# Altium PCB PCB1.PcbDoc
Units mm, origin at the board's own origin, x right, y up, seen from the top; angles counter-clockwise.
Board outline 100 x 80 mm, 2 copper layers (Top Layer, Bottom Layer), stack 1.535 mm thick; 21 components, 19 nets, 131 pads, 2 vias.
Unrouted connection lines stored in the file: 2.
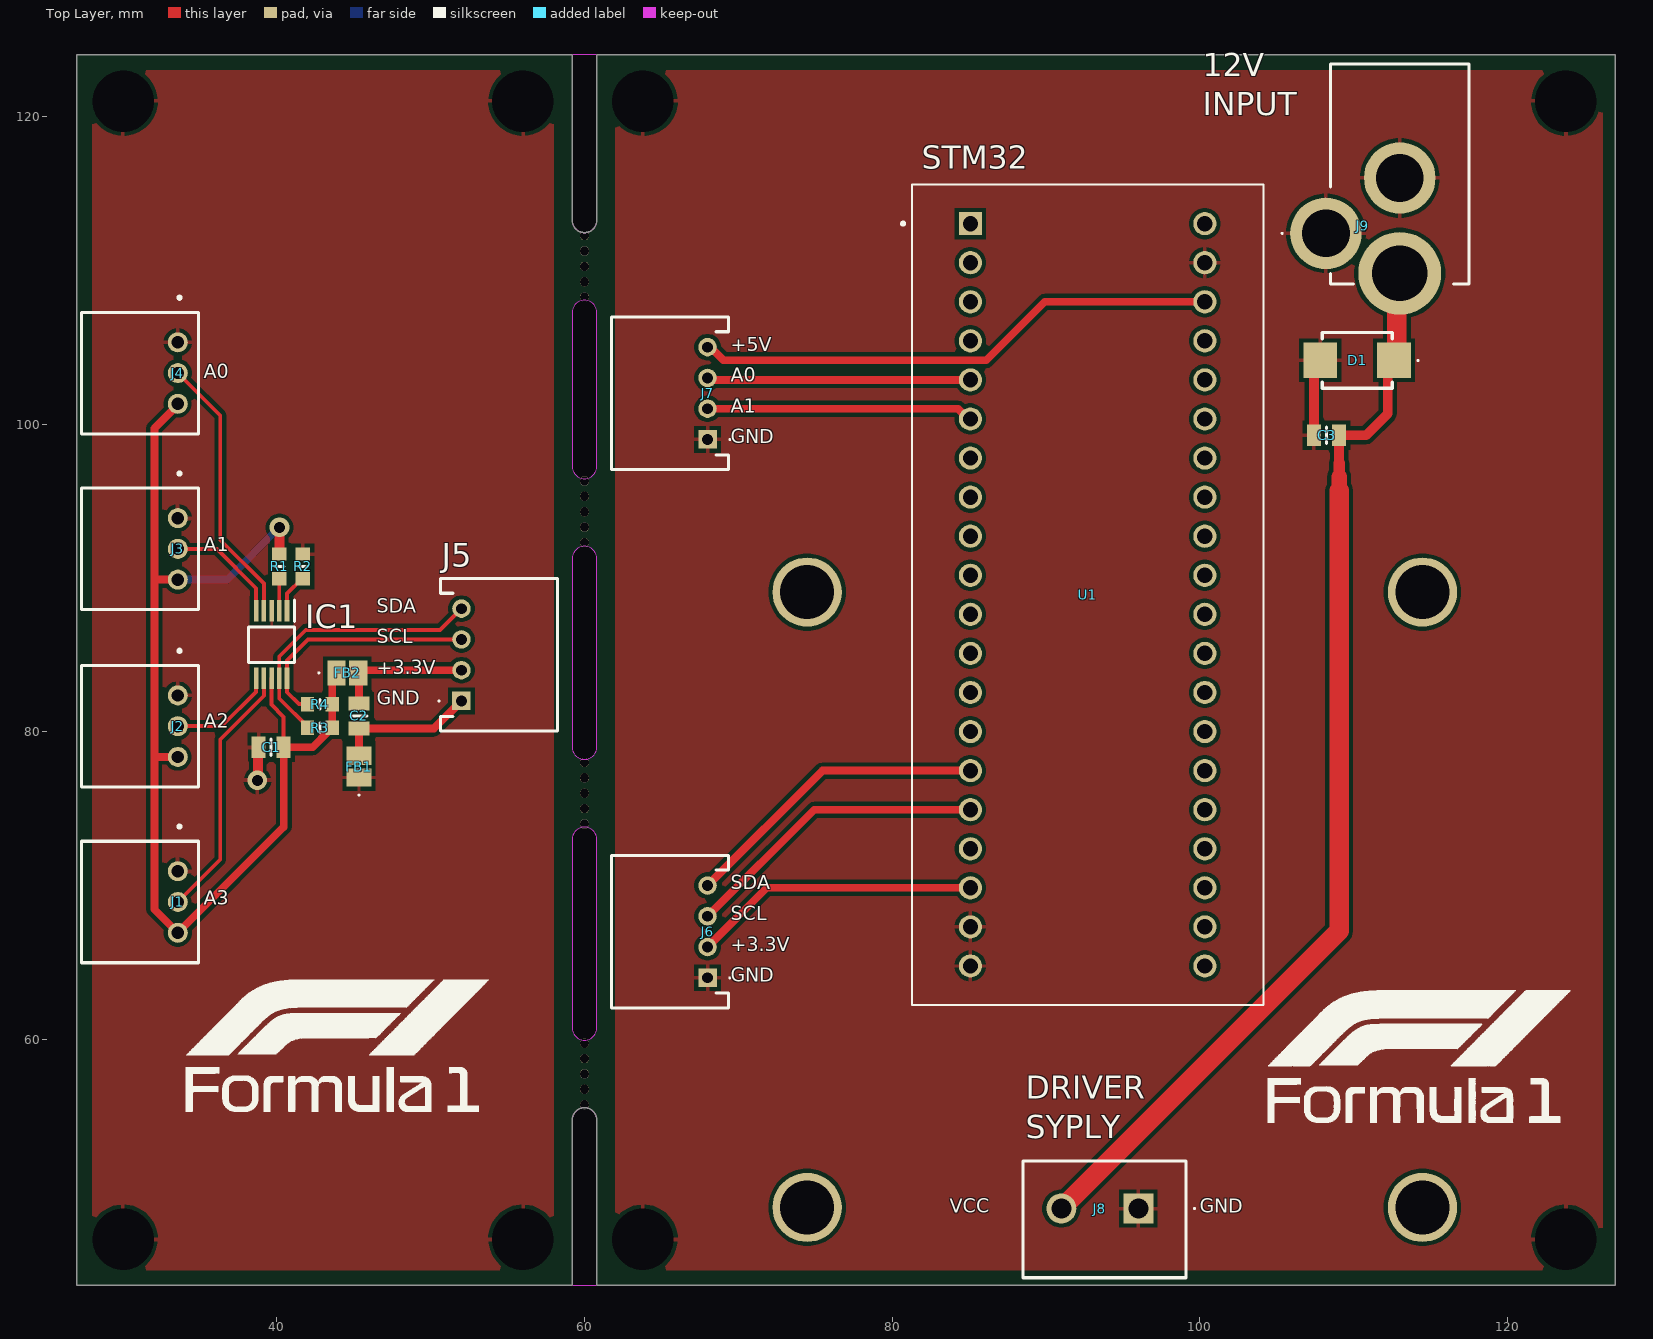
[diagram p0: Top Layer view]
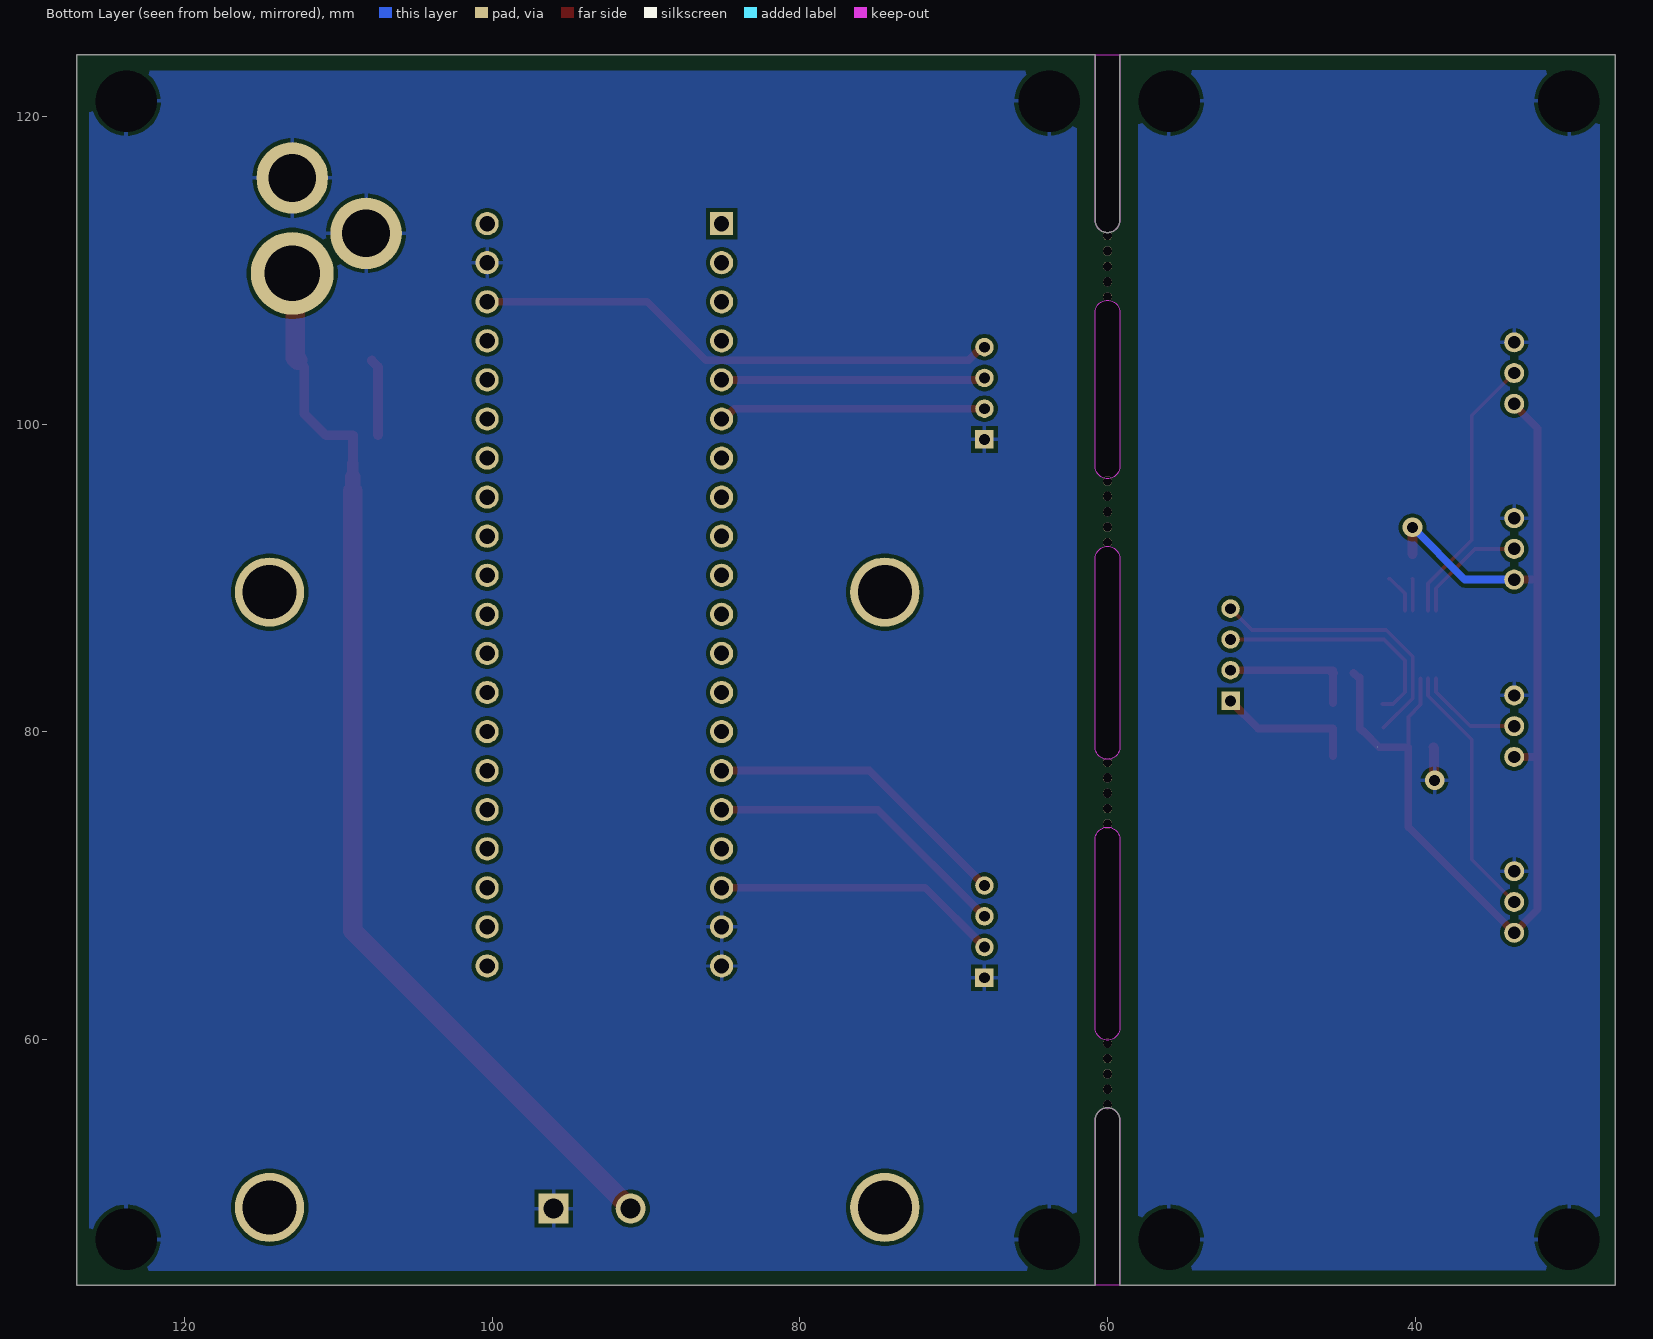
[diagram p1: Bottom Layer view, seen from below]
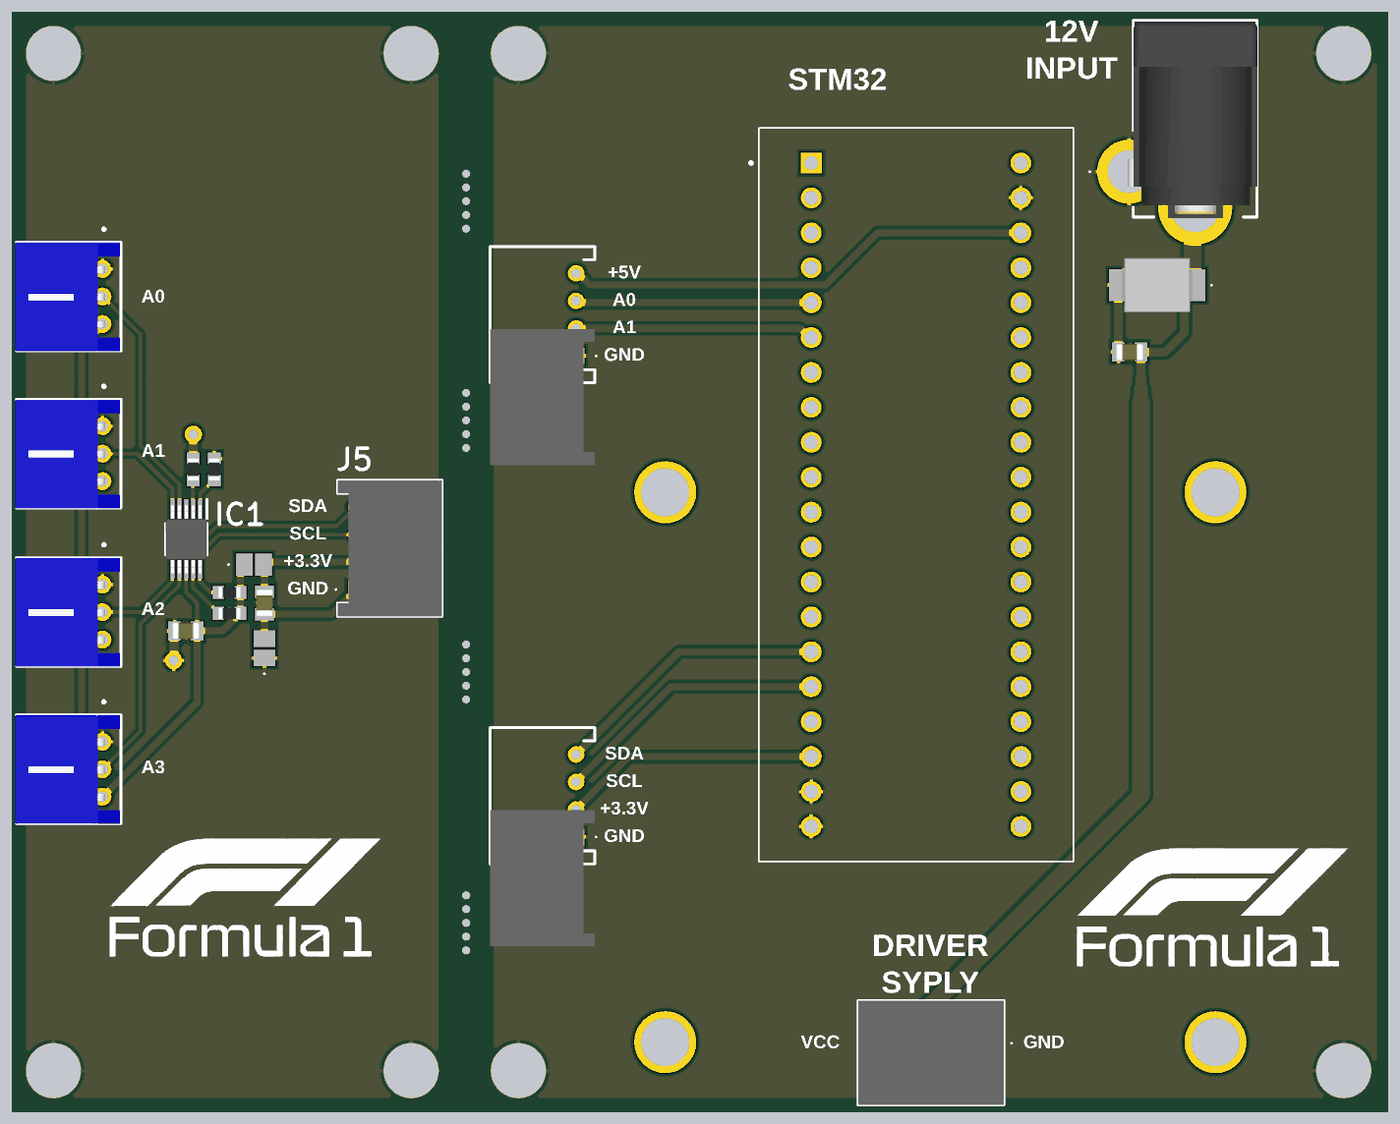
[diagram p2: 3D render of the assembled board from above, using the file's embedded part models]

## Layer stack, top to bottom
Top Solder: solder mask 0.0102, Solder Resist, Dk 3.5
Top Layer: signal copper 0.035
Dielectric 1: dielectric 1.465, FR-4, Dk 4.8
Bottom Layer: signal copper 0.035
Bottom Solder: solder mask 0.0102, Solder Resist, Dk 3.5

## Board outline
59.2,44 59.2,54.75 cw(c60,54.75) 60,55.55 cw(c60,54.75) 60.8,54.75 60.8,44 127,44 127,124 60.8,124 60.8,113.25 cw(c60,113.25) 60,112.45 cw(c60,113.25) 59.2,113.25 59.2,124 27,124 27,44
cut-out: 59.2,113.25 ccw(c60,113.25) 60.8,113.25 60.8,124 59.2,124
cut-out: 60.8,54.75 ccw(c60,54.75) 59.2,54.75 59.2,44 60.8,44
cut-out: 60.8,73 ccw(c60,73) 59.2,73 59.2,60.75 ccw(c60,60.75) 60.8,60.75
cut-out: 59.2,79 ccw(c60,79) 60.8,79 60.8,91.25 ccw(c60,91.25) 59.2,91.25
cut-out: 59.2,97.25 ccw(c60,97.25) 60.8,97.25 60.8,107.25 ccw(c60,107.25) 59.2,107.25

## Design rules (kind name [scope] priority, off if disabled: settings)
Clearance [All] p1: gap=0.254 ignorepadtopadclearanceinfootprint=FALSE except(0.127: Arc-Arc Arc-Track Arc-SMDPad Track-Track Track-SMDPad SMDPad-SMDPad)
PolygonConnect [All] p1: connectstyle=Relief reliefconductorwidth=0.254 reliefentries=4 polygonreliefangle="90 Angle" airgapwidth=0.254
RoutingVias [All] p1: holewidth=0.711 width=1.27 viastyle="Through Hole" minholewidth=0.711 minwidth=1.27 maxholewidth=0.711 maxwidth=1.27
SolderMaskExpansion [All] p1: expansion=0.102 istentingtop=FALSE
SupplyNets "Schematic Supply Nets_4" [InNet('VCC')] p1: voltage=0.000
SupplyNets "Schematic Supply Nets_3" [InNet('+5')] p2: voltage=0.000
SupplyNets "Schematic Supply Nets_2" [InNet('+3.3')] p3: voltage=0.000
SupplyNets "Schematic Supply Nets_1" [InNet('GND')] p4: voltage=0.000
SupplyNets "Schematic Supply Nets" [InNet('VDD')] p5: voltage=0.000
Width [All] p1: maxlimit=2.54 minlimit=0.254 preferedwidth=0.254 minimp=50.000000 maximp=50.000000 favimp=50.000000
30 further rules are at their usual default settings.

## Classes and differential pairs
component class Main: C1 C2 C3 D1 FB1 IC1 J4 J5 J7 J8 J9 R1 R3 R4

## Components (designator, comment, footprint, x,y, rotation, side; value= is the part's Value field where it differs from the comment)
C1 "1u 0805" CAPC2012X135N 39.624,78.994 r180 top
C2 "1u 0805" CAPC2012X135N 45.339,81.026 r270 top
C3 "1u 0805" CAPC2012X135N 108.238,99.27 r180 top
D1 "10BJ15CA" 10BJ15CA 110.236,104.14 r180 top
FB1 "0805" MFBM1V2012102R 45.339,77.724 r90 top (schematic designator FB2)
FB2 "0805" MFBM1V2012102R 44.577,83.82 r0 top (schematic designator FB1)
IC1 "ADS1115IDGSR" SOP50P490X110-10N 39.656,85.662 r270 top
J1 "3pin MALE" S3BPHKSLFSN 33.56,70.93 r90 top (schematic designator J5)
J2 "3pin MALE" S3BPHKSLFSN 33.56,82.36 r90 top (schematic designator J4)
J3 "3pin MALE" S3BPHKSLFSN 33.56,93.885 r90 top (schematic designator J2)
J4 "3pin MALE" S3BPHKSLFSN 33.56,105.315 r90 top (schematic designator J1)
J5 "4pin MALE" S4BPHKSLFSN 52,82 r90 top (schematic designator J3)
J6 "4pin MALE" S4BPHKSLFSN 68,64 r90 top (schematic designator J9)
J7 "4pin MALE" S4BPHKSLFSN 68,99 r90 top
J8 "ARK500" TB50P2PBL 96,49 r180 top
J9 "PC-GK2.1" PCGK21 108.2,112.4 r270 top (schematic designator J6)
R1 "10k 0603" RESC1608X60N 40.164,90.742 r270 top
R2 "10k 0603" RESC1608X60N 41.688,90.742 r90 top (schematic designator R4)
R3 "10k 0603" RESC1608X60N 42.799,80.264 r180 top
R4 "10k 0603" RESC1608X60N 42.799,81.788 r180 top (schematic designator R2)
U1 "STM32F103C8T6" MODULE_ZC323000 92.71,88.9 r0 top

## Footprints (in the part's own frame and the unit in brackets; to place one, negate y for a bottom-side part, rotate by r counter-clockwise, add the part's x,y. Pads: shape width x height; smd on the part's side, far side on the other; paste and mask are expansions set on the pad)
10BJ15CA [mm]
  rect 2.2x2.3 smd: 1(-2.4,0) 2(2.4,0)
  silkscreen extent -4,-1.81 2.27,1.81, body extent -2.55,-1.97 2.55,1.97, height 2.44
CAPC2012X135N [mm]
  rect 0.91x1.39 smd: 1(-0.82,0) 2(0.82,0)
  silkscreen extent 0,-0.53 0,0.53, body extent -1,-0.63 1,0.63, height 1.35
MFBM1V2012102R [mm]
  rect 1.2x1.6 smd: 1(-0.7,0) 2(0.7,0)
  silkscreen extent -1.9,-0.05 -1.8,0.05
MODULE_ZC323000 [mm]
  rect 1.508x1.508 hole 1: 1(-7.62,24.13)
  round 1.508 hole 1: 2(-7.62,21.59) 3(-7.62,19.05) 4(-7.62,16.51) 5(-7.62,13.97) 6(-7.62,11.43) 7(-7.62,8.89) 8(-7.62,6.35) 9(-7.62,3.81) 10(-7.62,1.27) 11(-7.62,-1.27) 12(-7.62,-3.81) 13(-7.62,-6.35) 14(-7.62,-8.89) 15(-7.62,-11.43) 16(-7.62,-13.97) 17(-7.62,-16.51) 18(-7.62,-19.05) 19(-7.62,-21.59) 20(-7.62,-24.13) 21(7.62,-24.13) 22(7.62,-21.59) 23(7.62,-19.05) 24(7.62,-16.51) 25(7.62,-13.97) 26(7.62,-11.43) 27(7.62,-8.89) 28(7.62,-6.35) 29(7.62,-3.81) 30(7.62,-1.27) 31(7.62,1.27) 32(7.62,3.81) 33(7.62,6.35) 34(7.62,8.89) 35(7.62,11.43) 36(7.62,13.97) 37(7.62,16.51) 38(7.62,19.05) 39(7.62,21.59) 40(7.62,24.13)
  silkscreen extent -12.1,-26.67 11.43,26.67
PCGK21 [mm]
  round 4.65 hole 3.1: 2(0,0) 3(-3.6,4.8)
  round 5.385 hole 3.59: 4(2.6,4.8)
  silkscreen extent -11,-2.9 3.3,9.3, body extent -10.92,-0.09 3.38,9.33, height 12.54
RESC1608X60N [mm]
  rect 0.85x0.95 smd: 1(-0.8,0) 2(0.8,0)
  silkscreen extent 0,-0.3 0,0.3, body extent -0.8,-0.4 0.8,0.4, height 0.6
S3BPHKSLFSN [mm]
  round 1.3 hole 0.8: 1(0,0) 2(-2,0) 3(-4,0)
  silkscreen extent -5.95,-1.35 3,6.25, body extent -5.98,-1.27 1.92,6.33, height 4.68
S4BPHKSLFSN [mm]
  rect 1.2x1.2 hole 0.7: 1(0,0)
  round 1.2 hole 0.7: 2(2,0) 3(4,0) 4(6,0)
  silkscreen extent -1.95,-6.25 7.95,1.5, body extent -1.95,-6.25 7.95,1.35, height 4.9
SOP50P490X110-10N [mm]
  rect 1.4x0.3 smd: 1(-2.2,1) 2(-2.2,0.5) 3(-2.2,0) 4(-2.2,-0.5) 5(-2.2,-1) 6(2.2,-1) 7(2.2,-0.5) 8(2.2,0) 9(2.2,0.5) 10(2.2,1)
  silkscreen extent -2.9,-1.5 1.15,1.5, body extent -2.46,-1.5 2.46,1.5, height 1.1
TB50P2PBL [mm]
  rect 1.95x1.95 hole 1.3: 1(0,0)
  round 1.95 hole 1.3: 2(5,0)
  silkscreen extent -3.7,-3.1 7.5,4.5, body extent -3.1,-3.1 7.5,4.5, height 10.1

## Part data
C1 C2 C3: library part CL21B105KBFNNNE, "Capacitor", Manufacturer_Name=SAMSUNG, Mouser Part Number=187-CL21B105KBFNNNE, Arrow Part Number=CL21B105KBFNNNE, Arrow Price/Stock=https://www.arrow.com/en/products/cl21b105kbfnnne/samsung-electro-mechanics?region=europe, Datasheet Link=https://componentsearchengine.com/Datasheets/2/CL21B105KBFNNNE.pdf, Height=1.35mm, Manufacturer_Part_Number=CL21B105KBFNNNE, Mouser Price/Stock=https://www.mouser.co.uk/ProductDetail/Samsung-Electro-Mechanics/CL21B105KBFNNNE?qs=yOVawPpwOwmddQEBPU6Y9A%3D%3D
D1: "TVS Diode (Bi-directional)", Manufacturer_Name=Eaton, Mouser Part Number=504-10BJ15CA, Datasheet Link=https://www.eaton.com/content/dam/eaton/products/electronic-components/resources/data-sheet/eaton-10bj-tvs-diode-power-esd-suppressor-data-sheet.pdf, Height=2.4mm, Manufacturer_Part_Number=10BJ15CA, Mouser Price/Stock=https://www.mouser.co.uk/ProductDetail/Eaton-Electronics/10BJ15CA?qs=zW32dvEIR3u4l1NPNgEw9g%3D%3D
FB1 FB2: library part MFBM1V2012-102-R, "Ferrite Bead", Manufacturer_Name=Eaton, Arrow Part Number=MFBM1V2012-102-R, Arrow Price/Stock=https://www.arrow.com/en/products/mfbm1v2012-102-r/eaton?region=nac, Datasheet Link=https://www.eaton.com/content/dam/eaton/products/electronic-components/resources/data-sheet/eaton-mfbm1v2012-high-current-multilayer-ferrite-chip-bead-data-sheet.pdf, Height=1.1mm, Manufacturer_Part_Number=MFBM1V2012-102-R
IC1: "Integrated Circuit", Manufacturer_Name="Texas Instruments", Mouser Part Number=595-ADS1115IDGSR, Arrow Part Number=ADS1115IDGSR, Arrow Price/Stock=https://www.arrow.com/en/products/ads1115idgsr/texas-instruments?utm_currency=USD&region=nac, Datasheet Link=http://www.ti.com/lit/gpn/ADS1115, Height=1.1mm, Manufacturer_Part_Number=ADS1115IDGSR, Mouser Price/Stock=https://www.mouser.co.uk/ProductDetail/Texas-Instruments/ADS1115IDGSR?qs=IK5e5L0zOXjKCJoVMhYO%2FQ%3D%3D
J1 J2 J3 J4: library part S3B-PH-K-S__LF__SN_, "Connector", Manufacturer_Name="JST (JAPAN SOLDERLESS TERMINALS)", Manufacturer_Part_Number="S3B-PH-K-S (LF)(SN)", Datasheet Link=http://www.farnell.com/datasheets/2057211.pdf, Height=4.8mm
J5 J6 J7: library part S4B-PH-K-S__LF__SN_, "Connector", Manufacturer_Name="JST (JAPAN SOLDERLESS TERMINALS)", Manufacturer_Part_Number="S4B-PH-K-S (LF)(SN)", Datasheet Link=sdfsds, Height=4.8mm
J8: library part TB-5.0-P-2P_BL, "TB-5.0-P-2P_BL, Connector", Manufacturer_Name=Ninigi, Manufacturer_Part_Number=TB-5.0-P-2P/BL, Datasheet Link=https://ninigi.com/gb/en/product/ninigi/terminal-blocks/tb-5.0-p-2p%252Fbl/tb-5-0-p-2p-bl/113584/, Height=10mm
J9: "Connector", Manufacturer_Name=Ninigi, Datasheet Link=https://www.tme.eu/Document/78afd4fb8a41e4211137cd818ea9e93d/PC-GK21.jpg, Height=11.2mm, Manufacturer_Part_Number=PC-GK2.1
R1 R2 R3 R4: library part WR06X1002FTL, "Resistor", Manufacturer_Name="Walsin Technology Corporation", Mouser Part Number=791-WR06X1002FTL, Arrow Part Number=WR06X1002FTL, Arrow Price/Stock=https://www.arrow.com/en/products/wr06x1002ftl/walsin-technology?region=europe, Datasheet Link=https://4donline.ihs.com/images/VipMasterIC/IC/WATC/WATCS01091/WATCS01091-1.pdf?hkey=EF798316E3902B6ED9A73243A3159BB0, Height=0.6mm, Manufacturer_Part_Number=WR06X1002FTL, Mouser Price/Stock=https://www.mouser.co.uk/ProductDetail/Walsin/WR06X1002FTL?qs=1w%252B2sDiFrrGhwDUNQrfEaQ%3D%3D
U1: library part CMP-007-000000-1, "STM32F103C8T6 ARM STM32 Minimum System Development Board Module For Arduino", Package=None, Availability=Unavailable, Component Type=Standard, Design Item ID=ZC323000, MP=ZC323000, Pin Count=40, Price=None, Source=ZC323000.SchLib

## Free pads (board coordinates)
  round 4.5 hole 3.5: MH(74.475,49.075) MH(74.475,89.075) MH(114.475,49.075) MH(114.475,89.075)
  round 1.524 hole 4: MH5(30,47) MH5(30,121) MH5(56,47) MH5(56,121) MH5(63.8,47) MH5(63.8,121) MH5(123.8,47) MH5(123.8,121)
  round 0.6 hole 0.6 unplated mask+0: ""(60,55.75) ""(60,56.75) ""(60,57.75) ""(60,58.75) ""(60,59.75) ""(60,74) ""(60,75) ""(60,76) ""(60,77) ""(60,78) ""(60,92.3) ""(60,93.3) ""(60,94.3) ""(60,95.3) ""(60,96.3) ""(60,108.25) ""(60,109.25) ""(60,110.25) ""(60,111.25) ""(60,112.25)

## Via types
v1: diameter 1.27, hole 0.711, Top Layer to Bottom Layer, 2 vias

## Nets (pads, with @x,y where several pads share a name; then routed paths per layer and width w, separated by ;. In a path a pad name is that pad's centre, name@x,y a point inside that pad or via, vN(x,y) a via of type N, cw(c..) or ccw(c..) an arc to the next point about the centre after c; other vN are vias at no path point)
+3.3: J6.2 U1.18 U1.40 | length 18.7
  Top Layer w0.508: J6.2 71.85,69.85 U1.18
+5: J7.4 U1.38 | length 34.3
  Top Layer w0.508: J7.4 68.187,105 69.039,104.148 86.114,104.148 89.916,107.95 U1.38
A0: J7.3 U1.5 | length 17.1
  Top Layer w0.508: J7.3 68.13,102.87 U1.5
A1: J7.2 U1.6 | length 17.4
  Top Layer w0.508: J7.2 84.282,101 84.952,100.33 U1.6
ADDR: IC1.1 R2.1 | length 2.5
  Top Layer w0.254: IC1.1 40.672,87.878 40.672,88.976 41.638,89.942 R2.1
AIN0: IC1.4 J4.2 | length 17.8
  Top Layer w0.254: J4.2 36.322,100.553 36.322,92.456 39.156,89.622 IC1.4
AIN1: IC1.5 J3.2 | length 7.6
  Top Layer w0.254: J3.2 36.1,91.885 38.656,89.329 IC1.5
AIN2: IC1.6 J2.2 | length 6.9
  Top Layer w0.254: J2.2 36.418,80.36 38.648,82.59 38.648,83.454 IC1.6
AIN3: IC1.7 J1.2 | length 16.8
  Top Layer w0.254: J1.2 36.322,71.692 36.322,79.502 39.156,82.336 IC1.7
ALERT: IC1.2 R1.2 | length 2.1
  Top Layer w0.254: IC1.2 40.156,89.934 R1.2
GND: C1.2 C3.2 D1.2 FB1.1 IC1.3 J1.1 J2.1 J3.1 J4.1 J6.1 J7.1 J8.1 J9.2 J9.3 pad.MH5 R2.2 U1.19 U1.20 U1.39 | length 7.2
  Top Layer w0.635: v1(38.735,76.835) 38.77,76.87 38.77,78.96 C1.2 ; C3.2 107.418,103.722 D1.2
NetC2_1: C2.1 FB2.2 J5.2 | length 9
  Top Layer w0.508: FB2.2 45.457,84 J5.2 ; FB2.2@45.33,84 FB2.2@45.466,83.864 ; C2.1 FB2.2@45.339,83.864
NetC2_2: C2.2 FB1.2 J5.1 | length 9.2
  Top Layer w0.508: FB1.2 C2.2 50.206,80.206 J5.1
SCL: J6.3 U1.16 | length 20
  Top Layer w0.508: J6.3 74.93,74.93 U1.16
SCL1: IC1.10 J5.3 R4.2 | length 15.8
  Top Layer w0.254: R4.2@42.126,81.788 41.434,81.788 40.656,82.566 IC1.10 40.656,84.63 42.026,86 J5.3
SDA: J6.4 U1.15 | length 20.2
  Top Layer w0.508: J6.4 75.47,77.47 U1.15
SDA1: IC1.9 J5.4 R3.2 | length 18.5
  Top Layer w0.254: R3.2@42.049,80.264 40.156,82.157 IC1.9 40.156,84.892 41.878,86.614 50.614,86.614 J5.4
VCC: C3.1 D1.1 J8.2 J9.4 | length 70.9
  Top Layer w0.635: 109.058,97.444 C3.1 110.816,99.27 112.214,100.668 112.214,103.718 D1.1
  Top Layer w0.762: 109.058,96.569 109.058,97.444
  Top Layer w1.016: 109.058,95.65 109.058,96.569
  Top Layer w1.27: J8.2 109.058,67.058 109.058,95.65 ; D1.1 112.818,104.322 112.818,109.618 J9.4
VDD: C1.1 FB2.1 IC1.8 J1.3 J2.3 J3.3 J4.3 R1.1 R3.1 R4.1 | length 75.6
  Top Layer w0.254: IC1.8 39.656,81.756 40.444,80.968 C1.1
  Top Layer w0.508: J2.3 32.1,78.36 32.036,78.296 ; J3.3 32.036,89.885 ; J4.3 33.56,101.238 32.036,99.714 32.036,89.885 ; R3.1 R3.1@43.599,80.214 ; FB2.1@43.599,83.542 R4.1 R3.1@43.599,80.214 ; FB2.1@43.726,83.542 FB2.1@44.004,83.82 ; 32.036,78.296 32.036,89.885 ; 32.036,78.296 32.036,68.454 J1.3 40.444,73.814 C1.1 42.329,78.994 43.378,80.043 43.428,80.043 R3.1@43.599,80.214
  Top Layer w0.635: R1.1 40.168,91.546 40.168,93.278 v1(40.172,93.282)
  Bottom Layer w0.508: J3.3 36.767,89.885 40.164,93.282 v1(40.172,93.282)
pads on no net: U1.1 U1.2 U1.3 U1.4 U1.7 U1.8 U1.9 U1.10 U1.11 U1.12 U1.13 U1.14 U1.17 U1.21 U1.22 U1.23 U1.24 U1.25 U1.26 U1.27 U1.28 U1.29 U1.30 U1.31 U1.32 U1.33 U1.34 U1.35 U1.36 U1.37

## Polygon pours and split planes (outlines as drawn)
GND on Top Layer "NONET_L-01_P-001" (solid, pour order 3): 62,47 62,121 cw(c64,121) 64,123 124.2,123 cw(c124.2,121) 126.2,121 126.2,47 cw(c124.2,47) 124.2,45 64,45 cw(c64,47)
GND on Top Layer "NONET_L-01_P-001" (solid, pour order 0): 28,47 28,121 cw(c30,121) 30,123 56,123 cw(c56,121) 58,121 58,47 cw(c56,47) 56,45 30,45 cw(c30,47)
GND on Bottom Layer "NONET_L-01_P-001" (solid, pour order 5): 62.008,46.958 62.008,120.958 cw(c64.008,120.958) 64.008,122.958 124.208,122.958 cw(c124.208,120.958) 126.208,120.958 126.208,46.958 cw(c124.208,46.958) 124.208,44.958 64.008,44.958 cw(c64.008,46.958)
GND on Bottom Layer "NONET_L-01_P-001" (solid, pour order 2): 28,47 28,121 cw(c30,121) 30,123 56,123 cw(c56,121) 58,121 58,47 cw(c56,47) 56,45 30,45 cw(c30,47)

## Silkscreen, mask and mechanical layers (free items; w line width, h text height)
Top Overlay:
  drawing of 22 lines, arcs and shapes, not listed
  text "12V / INPUT" at 100.19,119.595 h2.54
  text "STM32" at 81.92,116.095 h2.54
  text "+5V" at 69.5,104.45 h1.52
  text "A0" at 35.25,102.7 h1.52
  text "A0" at 69.5,102.45 h1.52
  text "A1" at 69.5,100.45 h1.52
  text "GND" at 69.5,98.45 h1.52
  text "A1" at 35.25,91.45 h1.52
  text "SDA" at 46.5,87.45 h1.52
  text "SCL" at 46.5,85.45 h1.52
  text "+3.3V" at 46.5,83.45 h1.52
  text "GND" at 46.5,81.45 h1.52
  text "A2" at 35.25,79.95 h1.52
  text "SDA" at 69.5,69.45 h1.52
  text "A3" at 35.25,68.45 h1.52
  text "SCL" at 69.5,67.45 h1.52
  text "+3.3V" at 69.5,65.45 h1.52
  text "GND" at 69.5,63.45 h1.52
  text "DRIVER   / SYPLY" at 88.67,53.095 h2.54
  text "VCC" at 83.75,48.45 h1.52
  text "GND" at 100,48.45 h1.52
Bottom Overlay:
  region: 42.43,79.531 42.444,79.531 42.444,79.546 42.43,79.546
  region: 42.4,79.867 42.386,79.867 42.386,79.852 42.4,79.852
  region: 42.167,60.456 42.182,60.456 42.182,60.471 42.167,60.471
  region: 42.43,78.992 42.43,79.006 42.415,79.006 42.415,78.992
Mechanical 1:
  lines w0.254: 60,112.45 cw(c60,113.25) 59.2,113.25 59.2,113.6 59.2,124 27,124 27,44 59.2,44 59.2,54.75 cw(c60,54.75) 60,55.55 cw(c60,54.75) 60.8,54.75 60.8,44 127,44 127,124 60.8,124 60.8,113.25 cw(c60,113.25) 60,112.45 ; 60,112.45 60,112.45